# Altium PCB SLT_4U_PEE_V100.PcbDoc (part 5 of 7)
Units mm, origin at the board's own origin, x right, y up, seen from the top; angles counter-clockwise.
Board outline 180 x 80 mm, 6 copper layers (L1 TOP, L2 GND 1, L3 SIGNAL, L4 PWR, L5 GND 2, L6 BOT), stack 1.536 mm thick; 1123 components, 840 nets, 3813 pads, 351 vias.
Unrouted connection lines stored in the file: 2064.
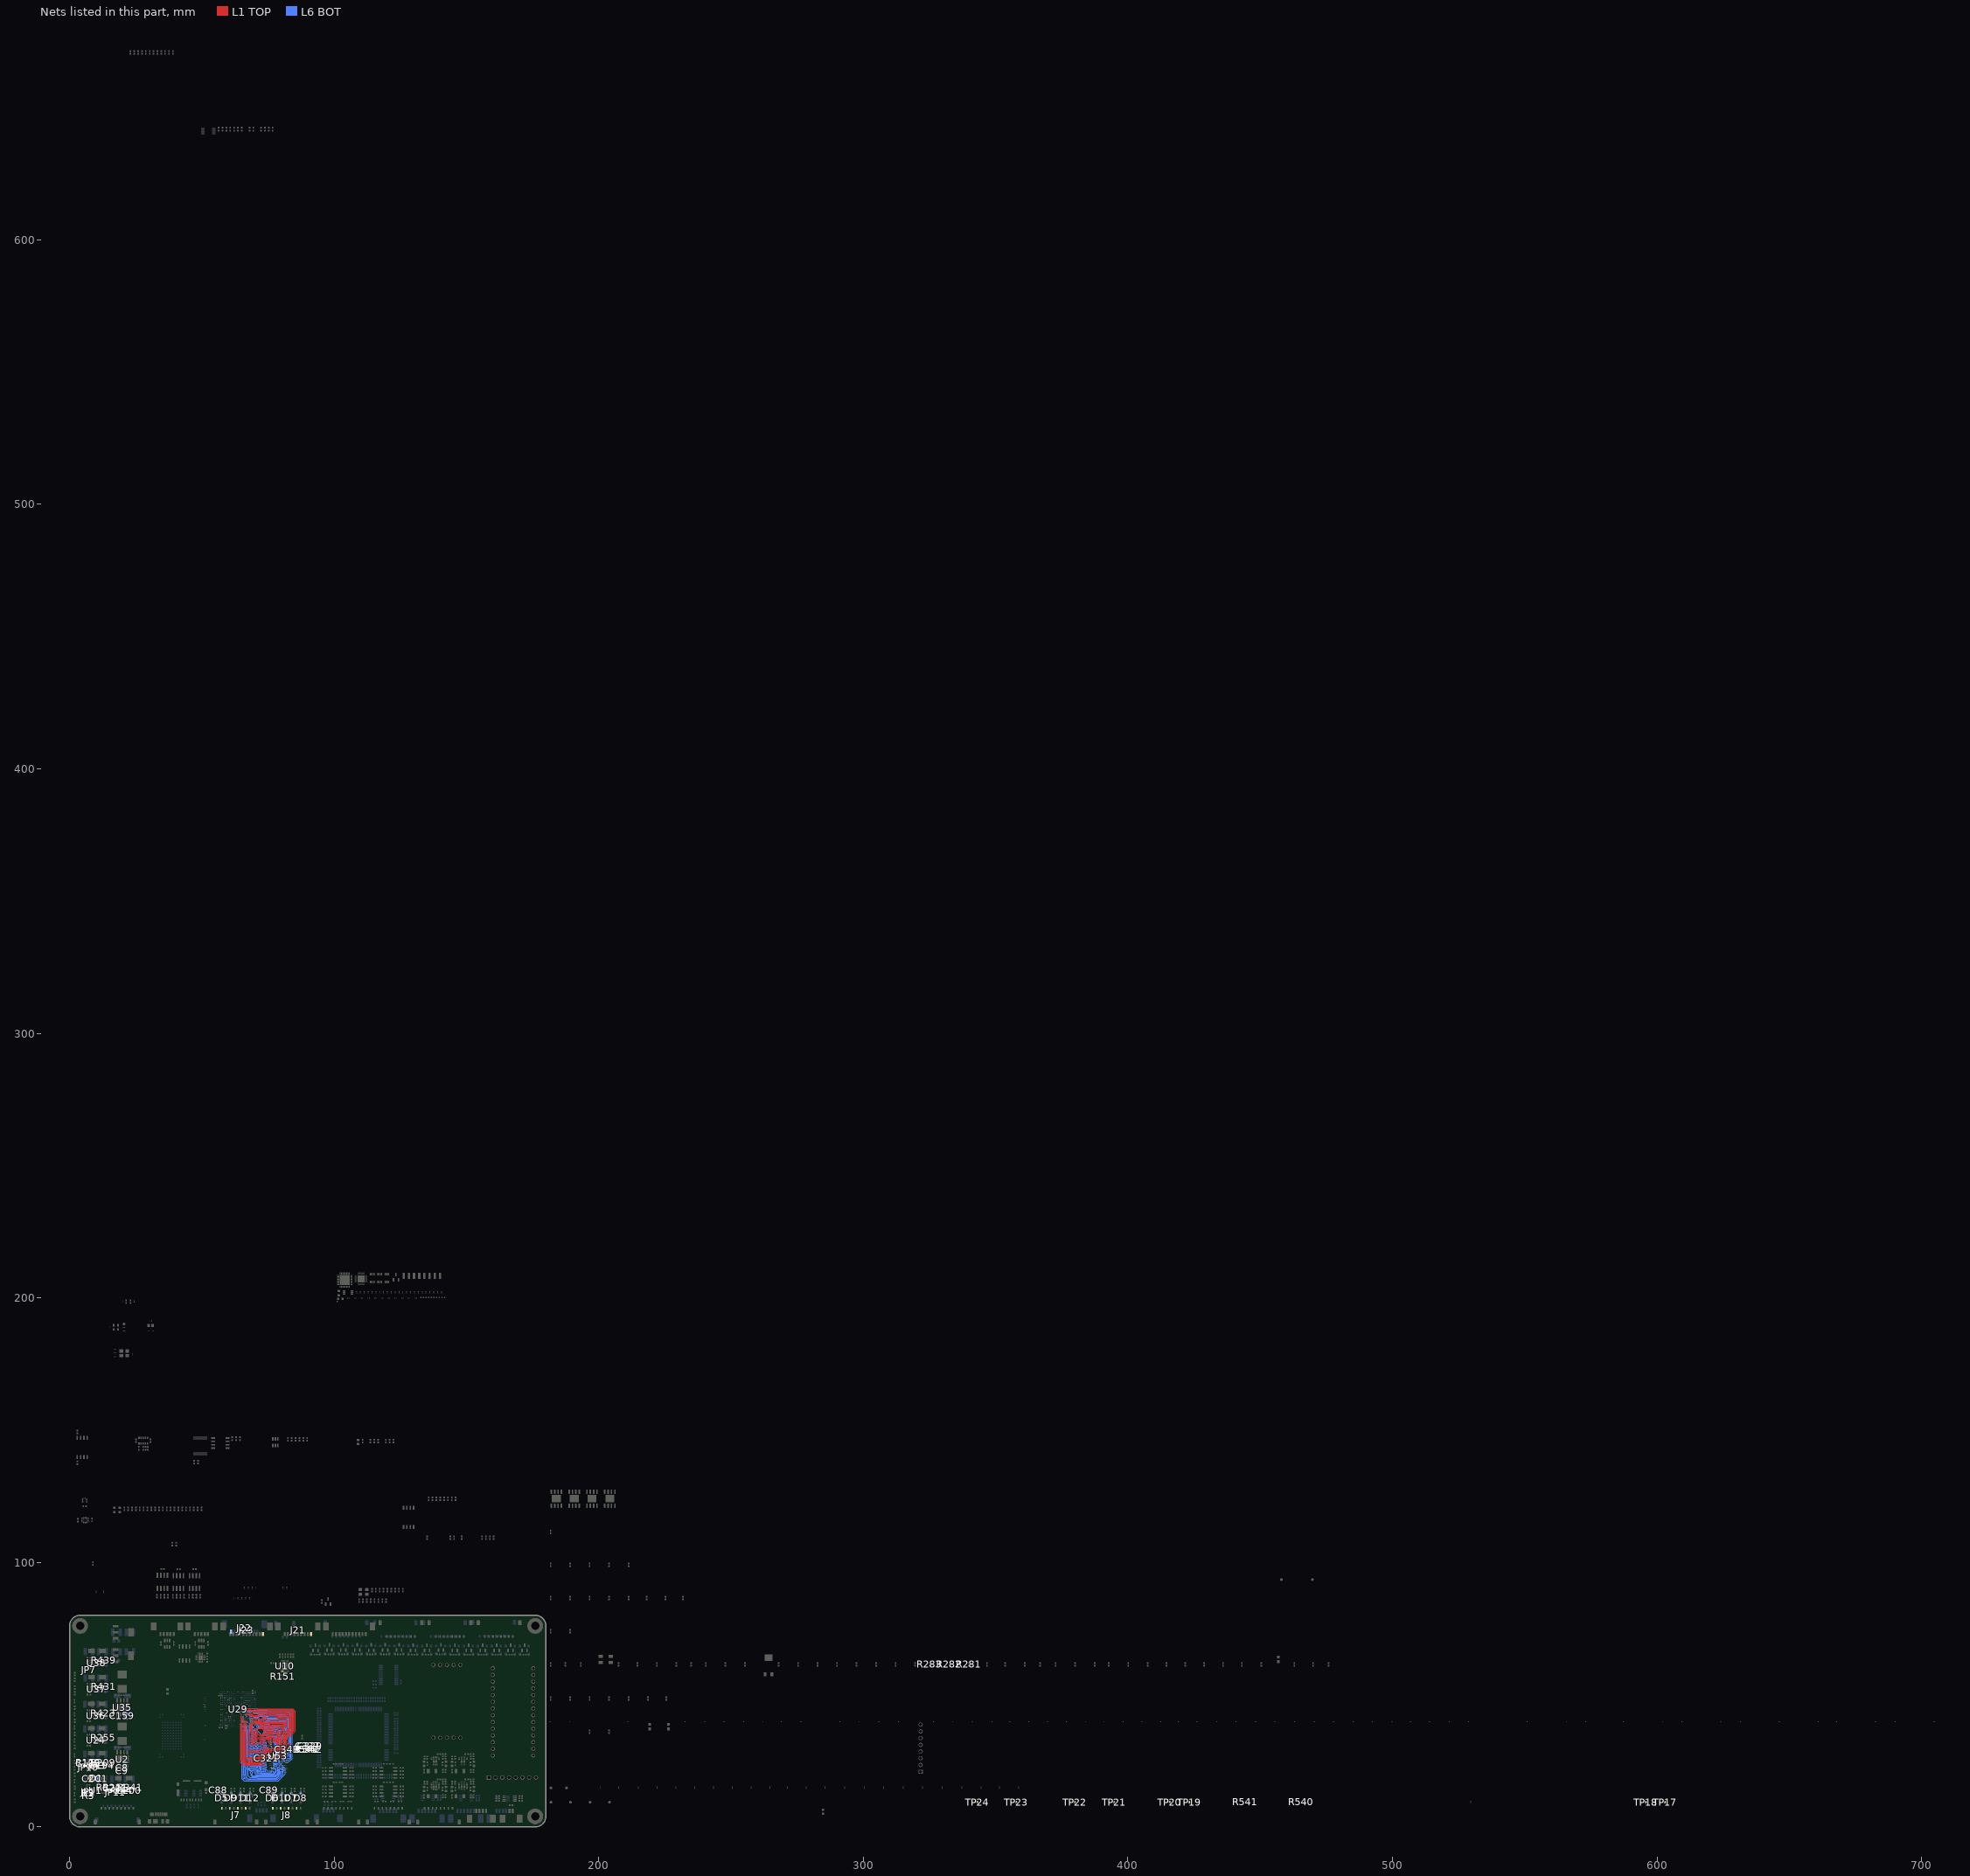
[diagram p5: the nets of this part, all layers, seen from the top]

## Via types
v1: diameter 0.35, hole 0.15, L1 TOP to L6 BOT, 281 vias
v2: diameter 0.4, hole 0.2, L1 TOP to L6 BOT, 61 vias
v3: diameter 0.4, hole 0.2, L1 TOP to L6 BOT, tented both sides, 9 vias

## Nets (pads, with @x,y where several pads share a name; then routed paths per layer and width w, separated by ;. In a path a pad name is that pad's centre, name@x,y a point inside that pad or via, vN(x,y) a via of type N, cw(c..) or ccw(c..) an arc to the next point about the centre after c; other vN are vias at no path point) (continued)
DDR_A3: U29.V6 U53.N2 | length 34
  L1 TOP w0.125: v1(67.237,39.587) 67.918,38.907 67.918,37.951 67.962,37.907 67.962,37.012 67.612,36.662 67.612,35.962 67.412,35.762 67.412,27.262 67.512,27.162 67.812,27.162 67.912,27.262 67.912,28.062 68.012,28.162 71.512,28.162 71.612,28.262 71.612,28.562 71.512,28.662 67.912,28.662 67.812,28.762 67.812,29.062 67.912,29.162 71.612,29.162 71.912,28.862 72.112,28.862 72.512,29.262 73.312,30.062 73.312,30.662 73.412,30.762 73.812,30.762 73.912,30.662 73.912,30.262 74.112,30.062 75.062,30.062 75.237,30.237 75.237,30.712 75.387,30.862 v1(75.862,30.862)
  L6 BOT w0.125: U29.V6@66.912,39.912 v1(67.237,39.587) ; v1(75.862,30.862) U53.N2@76.262,30.462
DDR_A4: U29.R6 U53.P8 | length 34
  L1 TOP w0.125: v1(66.587,42.187) 66.95,42.55 67.636,42.55 67.655,42.568 68.068,42.568 68.099,42.537 68.937,42.537 69.325,42.15 71.1,42.15 71.612,42.662 81.412,42.662 81.512,42.562 81.512,42.262 81.412,42.162 81.112,42.162 81.012,42.062 81.012,41.762 81.112,41.662 83.262,41.662 83.412,41.512 83.412,37.462 81.212,35.262 81.212,32.162 81.075,32.025 81.075,31.5 81.287,31.287 81.987,31.287 82.112,31.162 82.112,30.562 81.987,30.437 81.587,30.437 81.462,30.562 v1(81.462,30.862)
  L6 BOT w0.125: v1(66.587,42.187) U29.R6@66.912,41.862 ; U53.P8@81.062,31.262 v1(81.462,30.862)
DDR_A5: U29.W4 U53.P2 | length 34
  L1 TOP w0.125: v1(68.53,38.937) 68.53,36.462 68.312,36.244 68.312,35.462 68.212,35.362 68.212,31.062 68.312,30.962 68.612,30.962 68.712,31.062 68.712,34.362 68.812,34.462 69.112,34.462 69.212,34.362 69.212,31.062 69.312,30.962 69.612,30.962 69.712,31.062 69.712,34.362 69.812,34.462 70.112,34.462 70.212,34.362 70.212,31.062 70.312,30.962 70.712,30.962 70.812,31.062 70.812,31.562 71.012,31.762 71.812,31.762 72.312,31.262 72.712,31.262 73.112,31.662 73.512,31.662 73.912,32.062 73.912,32.962 74.212,33.262 75.012,33.262 75.237,33.037 75.237,31.987 75.562,31.662 v1(75.862,31.662)
  L6 BOT w0.125: U29.W4@68.212,39.262 68.212,39.012 68.287,38.937 v1(68.53,38.937) ; v1(75.862,31.662) 75.862,31.337 75.937,31.262 U53.P2@76.262,31.262
DDR_A6: U29.P7 U53.R8 | length 34
  L1 TOP w0.125: v1(66.587,42.837) 67.099,42.837 67.137,42.8 67.532,42.8 67.551,42.818 68.418,42.818 68.449,42.787 69.041,42.787 69.237,42.787 69.512,43.062 83.562,43.062 83.712,42.912 83.712,42.712 83.562,42.562 82.037,42.562 81.912,42.437 81.912,42.187 82.037,42.062 83.587,42.062 83.712,41.937 83.712,37.162 81.512,34.962 81.512,31.712 v1(81.462,31.662)
  L6 BOT w0.125: U29.P7@66.262,42.512 v1(66.587,42.837) ; U53.R8@81.062,32.062 81.062,31.762 81.162,31.662 v1(81.462,31.662)
DDR_A7: U29.W2 U53.R2 | length 34
  L1 TOP w0.125: v1(69.812,38.962) 69.487,38.962 69.037,38.512 69.037,35.437 69.212,35.262 71.112,35.262 71.212,35.362 71.212,35.662 71.112,35.762 69.512,35.762 69.412,35.862 69.412,36.162 69.512,36.262 71.062,36.262 71.162,36.362 71.162,36.662 71.062,36.762 70.362,36.762 70.237,36.887 70.237,37.162 70.337,37.262 72.837,37.262 73.137,36.962 74.775,36.962 75.275,36.462 76.512,36.462 76.612,36.362 76.612,36.062 76.512,35.962 74.762,35.962 74.512,36.212 74.512,36.462 74.412,36.562 73.512,36.562 73.412,36.462 73.412,36.162 73.512,36.062 74.112,36.062 74.212,35.962 74.212,35.662 74.112,35.562 73.312,35.562 73.212,35.462 73.212,35.162 73.312,35.062 74.112,35.062 74.212,34.962 74.212,34.662 74.112,34.562 73.312,34.562 73.212,34.462 73.212,34.062 73.312,33.962 75.737,33.962 75.862,33.837 v1(75.862,32.462)
  L6 BOT w0.1: U29.W2@69.512,39.262 v1(69.812,38.962)
  L6 BOT w0.125: v1(75.862,32.462) 76.187,32.462 76.262,32.387 U53.R2@76.262,32.062
DDR_A8: U29.L8 U53.T8 | length 34
  L1 TOP w0.1: v1(65.287,44.787) 65.312,44.812 70.837,44.812 70.987,44.662 71.437,44.662
  L1 TOP w0.125: 71.437,44.662 84.312,44.662 85.312,43.662 85.312,36.287 v1(82.462,33.437)
  L6 BOT w0.125: v1(65.287,44.787) U29.L8@65.612,44.462 ; U53.T8@81.062,32.862 81.562,33.362 82.387,33.362 v1(82.462,33.437)
DDR_A9: U29.V4 U53.R3 | length 34
  L1 TOP w0.125: v1(68.537,39.587) 68.812,39.312 68.962,39.312 69.112,39.162 69.112,38.98 68.787,38.655 68.787,34.987 68.912,34.862 70.312,34.862 70.512,34.662 70.512,32.362 70.662,32.212 70.862,32.212 71.012,32.362 71.012,34.662 71.212,34.862 71.812,34.862 71.912,34.762 71.912,33.862 71.812,33.762 71.512,33.762 71.412,33.662 71.412,33.362 71.512,33.262 71.812,33.262 71.912,33.162 71.912,32.262 72.037,32.137 72.287,32.137 72.412,32.262 72.412,33.162 72.212,33.362 72.212,33.662 72.412,33.862 72.412,34.862 72.512,34.962 72.812,34.962 72.912,34.862 72.912,32.262 73.037,32.137 73.287,32.137 73.412,32.262 73.412,33.462 73.55,33.6 75.375,33.6 75.487,33.487 75.487,32.212 75.637,32.062 76.912,32.062 78.012,32.062 78.112,32.162 78.112,32.462 78.012,32.562 76.762,32.562 v1(76.662,32.462)
  L6 BOT w0.125: U29.V4@68.212,39.912 v1(68.537,39.587) ; v1(76.662,32.462) 76.987,32.462 77.062,32.387 U53.R3@77.062,32.062
DDR_A10: U29.T3 U53.L7 | length 34
  L1 TOP w0.125: v1(69.187,40.887) 69.225,40.925 69.575,40.925 69.612,40.962 71.162,40.962 72.062,40.062 72.712,40.062 72.937,40.287 73.187,40.287 73.412,40.062 81.787,40.062 81.937,39.912 81.937,38.287 81.712,38.062 79.612,38.062 79.512,37.962 79.512,37.662 79.612,37.562 80.812,37.562 80.912,37.462 80.912,37.162 80.812,37.062 80.412,37.062 80.312,36.962 80.312,36.562 79.912,36.162 79.612,36.162 79.512,36.062 79.512,35.762 79.612,35.662 79.762,35.662 79.862,35.562 79.862,35.262 79.762,35.162 79.512,35.162 79.412,35.062 79.412,34.762 79.512,34.662 79.762,34.662 79.862,34.562 79.862,34.262 79.762,34.162 79.612,34.162 79.537,34.162 79.412,34.037 79.412,33.787 79.537,33.662 79.762,33.662 79.862,33.562 79.862,33.262 79.762,33.162 79.512,33.162 79.412,33.062 79.412,32.762 79.512,32.662 79.762,32.662 79.862,32.562 79.862,32.262 79.762,32.162 79.612,32.162 79.512,32.062 79.512,31.762 79.612,31.662 79.762,31.662 79.862,31.562 79.862,31.262 79.762,31.162 79.512,31.162 79.412,31.062 79.412,30.762 79.512,30.662 79.762,30.662 79.862,30.562 79.862,30.262 79.762,30.162 79.612,30.162 79.512,30.062 79.512,29.762 79.612,29.662 80.012,29.662 80.412,29.262 v1(80.662,29.262)
  L6 BOT w0.125: U29.T3@68.862,41.212 v1(69.187,40.887) ; U53.L7@80.262,28.862 v1(80.662,29.262)
DDR_A11: U29.M9 U53.R7 | length 34.1
  L1 TOP w0.125: v1(65.287,43.487) 65.562,43.762 71.412,43.762 71.512,43.862 83.912,43.862 84.512,43.262 84.512,36.762 82.087,34.337 82.087,32.587 v1(82.212,32.462)
  L6 BOT w0.125: U29.M9@64.962,43.812 v1(65.287,43.487) ; U53.R7@80.262,32.062 80.662,32.462 v1(82.212,32.462)
DDR_A12: U29.P5 U53.N7 | length 34.1
  L1 TOP w0.125: v1(67.864,42.206) 67.883,42.187 68.887,42.187 69.212,41.862 71.312,41.862 71.712,42.262 80.512,42.262 80.612,42.162 80.612,41.862 80.512,41.762 78.412,41.762 78.312,41.662 78.312,41.362 78.412,41.262 82.812,41.262 83.012,41.062 83.012,37.637 80.812,35.437 80.812,31.262 81.037,31.037 81.037,30.437 v1(80.662,30.062)
  L6 BOT w0.125: U29.P5@67.562,42.512 U29.P5@67.562,42.512 v1(67.864,42.206) v1(67.864,42.206) ; U53.N7@80.262,30.462 v1(80.662,30.062)
DDR_A13: U29.V2 U53.T3 | length 34
  L1 TOP w0.125: v1(69.812,39.612) 71.162,39.612 72.012,38.762 75.512,38.762 75.612,38.662 75.612,38.362 75.512,38.262 73.487,38.262 73.387,38.362 72.312,38.362 72.212,38.262 72.212,38.062 72.312,37.962 73.212,37.962 73.412,37.762 75.612,37.762 75.712,37.662 75.712,37.362 75.812,37.262 77.212,37.262 77.412,37.062 77.412,35.862 77.512,35.762 78.312,35.762 78.412,35.662 78.412,35.262 78.312,35.162 75.012,35.162 74.912,35.062 74.912,34.762 75.012,34.662 78.312,34.662 78.412,34.562 78.412,34.262 78.312,34.162 76.612,34.162 76.512,34.062 76.512,33.762 76.612,33.662 78.312,33.662 78.412,33.562 78.412,33.262 78.312,33.162 76.762,33.162 v1(76.662,33.262)
  L6 BOT w0.1: U29.V2@69.512,39.912 v1(69.812,39.612)
  L6 BOT w0.125: v1(76.662,33.262) 76.987,33.262 77.062,33.187 U53.T3@77.062,32.862
DDR_A14: U29.L9 U53.T7 | length 34
  L1 TOP w0.125: v1(65.287,44.137) 65.687,44.137 65.812,44.262 66.312,44.262 66.512,44.062 67.412,44.062 67.712,44.362 68.412,44.362 68.712,44.062 70.912,44.062 71.112,44.262 84.112,44.262 84.912,43.462 84.912,36.487 v1(82.462,34.037)
  L6 BOT w0.125: U29.L9@64.962,44.462 v1(65.287,44.137) ; U53.T7@80.262,32.862 81.162,33.762 82.187,33.762 v1(82.462,34.037)
DDR_A15: U29.R4 U53.M7 | length 34
  L1 TOP w0.125: v1(68.537,41.537) 68.812,41.262 71.312,41.262 72.112,40.462 72.612,40.462 73.012,40.862 73.012,41.262 73.212,41.462 74.412,41.462 74.509,41.365 74.509,41.059 74.412,40.962 73.512,40.962 73.412,40.862 73.412,40.562 73.512,40.462 82.062,40.462 82.262,40.262 82.262,38.012 80.212,35.962 80.212,29.962 80.512,29.662 80.912,29.662 81.062,29.512 81.062,28.987 80.937,28.862 79.512,28.862 79.412,28.962 79.412,29.162 79.512,29.262 v1(79.862,29.262)
  L6 BOT w0.125: U29.R4@68.212,41.862 v1(68.537,41.537) ; v1(79.862,29.262) U53.M7@80.262,29.662
DDR_BA0: U29.V8 U53.M2 | length 34
  L1 TOP w0.125: v1(65.937,39.587) 66.012,39.512 66.012,36.862 65.812,36.662 65.812,25.08 66.33,24.562 71.894,24.562 71.994,24.662 71.994,24.98 71.912,25.062 70.012,25.062 69.912,25.162 69.912,25.462 70.012,25.562 72.612,25.562 72.812,25.762 72.812,27.162 74.512,28.862 76.037,28.862 76.437,29.262 v1(76.662,29.262)
  L6 BOT w0.125: U29.V8@65.612,39.912 v1(65.937,39.587) ; U53.M2@76.262,29.662 v1(76.662,29.262)
DDR_BA1: U29.P4 U53.N8 | length 34
  L1 TOP w0.125: v1(69.062,43.162) 69.362,43.462 83.712,43.462 84.112,43.062 84.112,36.962 81.812,34.662 81.812,31.987 82.137,31.662 83.112,31.662 83.337,31.437 83.337,30.287 83.112,30.062 v1(81.462,30.062)
  L6 BOT w0.125: U29.P4@68.212,42.512 68.762,42.837 68.987,42.837 69.062,42.912 v1(69.062,43.162) ; U53.N8@81.062,30.462 v1(81.462,30.062)
DDR_BA2: U29.R8 U53.M3 | length 34.1
  L1 TOP w0.1: 66.037,39.912 66.762,39.912 66.912,39.762 66.912,39.496
  L1 TOP w0.125: v1(65.287,41.537) 65.712,41.112 65.712,40.237 66.037,39.912 ; 66.912,39.496 66.912,39.137 66.812,39.037 66.812,36.462 66.612,36.262 66.612,26.562 66.812,26.362 71.912,26.362 72.062,26.512 72.062,26.712 71.912,26.862 71.512,26.862 71.412,26.962 71.412,27.262 71.512,27.362 71.812,27.362 73.912,29.462 75.287,29.462 75.487,29.662 76.812,29.662 77.312,29.162 77.912,29.162 78.087,29.337 78.087,29.862 77.912,30.037 v1(76.637,30.037)
  L6 BOT w0.125: v1(65.287,41.537) U29.R8@65.612,41.862 ; v1(76.637,30.037) U53.M3@77.037,29.637
DDR_CAS: U29.T8 U53.K3 | length 34.1
  L1 TOP w0.125: v1(65.337,40.888) 65.337,38.766 65.202,38.631 65.202,36.872 65.412,36.662 65.412,24.962 66.212,24.162 72.012,24.162 73.212,25.362 73.212,26.962 74.712,28.462 76.112,28.462 76.512,28.862 77.912,28.862 78.112,28.662 78.112,28.462 77.912,28.262 77.662,28.262 v1(77.462,28.462)
  L6 BOT w0.125: v1(65.337,40.888) 65.337,40.913 65.612,41.188 U29.T8@65.612,41.212 ; U53.K3@77.062,28.062 v1(77.462,28.462)
DDR_CK_N: TP20.0 U29.T4 U53.K7 | length 34
  L1 TOP w0.1: v1(68.537,40.887) 68.773,40.651 68.928,40.651 69.042,40.537 69.156,40.537 69.431,40.262 69.467,40.262 69.517,40.212 69.807,40.212 69.832,40.237 70.842,40.237 70.867,40.212 71.412,40.212 72.062,39.562 81.136,39.562 81.462,39.236 81.462,38.788 81.136,38.462 76.386,38.462 76.286,38.362 76.286,38.062 76.386,37.962 78.786,37.962 79.062,37.686 79.062,36.412 79.062,28.312 79.162,28.212 79.612,28.212 v1(79.862,28.462)
  L6 BOT w0.1: U29.T4@68.212,41.212 v1(68.537,40.887) ; v1(79.862,28.462) U53.K7@80.262,28.062
DDR_CK_P: TP19.0 U29.U4 U53.J7 | length 34
  L1 TOP w0.1: v1(68.537,40.237) 68.605,40.237 68.719,40.351 68.804,40.351 68.918,40.237 69.032,40.237 69.307,39.962 69.957,39.962 69.982,39.937 71.263,39.937 71.938,39.262 81.012,39.262 81.162,39.112 81.162,38.912 81.012,38.762 76.262,38.762 75.986,38.486 75.986,37.938 76.262,37.662 78.662,37.662 78.762,37.562 78.762,37.437 78.762,28.188 79.038,27.912 79.612,27.912 v1(79.862,27.662)
  L6 BOT w0.1: U29.U4@68.212,40.562 v1(68.537,40.237) v1@68.562,40.237 ; v1(79.862,27.662) U53.J7@80.262,27.262
DDR_CKE: U29.V3 U53.K9 | length 34.1
  L1 TOP w0.1: v1(69.162,39.612) 69.487,39.287 69.903,39.287
  L1 TOP w0.125: 69.903,39.287 71.062,39.287 71.812,38.537 71.812,37.762 71.962,37.612 73.037,37.612 73.287,37.362 75.112,37.362 75.612,36.862 76.812,36.862 77.012,36.662 77.012,35.762 76.812,35.562 74.712,35.562 74.512,35.362 74.512,34.462 74.712,34.262 76.012,34.262 76.212,34.062 76.212,33.037 76.387,32.862 78.212,32.862 78.437,32.637 78.437,27.962 78.312,27.837 78.012,27.837 77.912,27.737 77.912,26.662 78.012,26.562 78.312,26.562 78.412,26.662 78.412,27.262 78.512,27.362 78.837,27.362 78.937,27.262 78.937,26.787 79.062,26.662 79.312,26.662 79.787,27.137 80.787,27.137 81.037,27.387 81.037,28.512 81.137,28.612 81.387,28.612 81.512,28.487 81.512,27.712 v1(81.462,27.662)
  L6 BOT w0.1: U29.V3@68.862,39.912 v1(69.162,39.612)
  L6 BOT w0.125: v1(81.462,27.662) 81.462,27.962 81.562,28.062 U53.K9@81.862,28.062
DDR_CS: U29.V7 U53.L2 | length 34
  L1 TOP w0.125: v1(66.587,39.587) 66.587,39.487 66.412,39.312 66.412,36.662 66.212,36.462 66.212,25.162 66.412,24.962 69.387,24.962 69.512,25.087 69.512,25.362 69.412,25.462 66.712,25.462 66.612,25.562 66.612,25.862 66.712,25.962 72.312,25.962 72.462,26.112 72.462,27.412 74.187,29.137 75.412,29.137 75.537,29.262 v1(75.862,29.262)
  L6 BOT w0.125: U29.V7@66.262,39.912 v1(66.587,39.587) ; v1(75.862,29.262) U53.L2@76.262,28.862
DDR_D0: TP17.0 U29.N2 U53.E3 | length 40.7
  L6 BOT w0.1: U29.N2@69.512,43.162 69.812,42.862
  L6 BOT w0.125: 69.812,42.862 69.825,42.85 70.687,42.85 70.712,42.875 73.4,42.875 74.012,42.262 74.712,42.262 74.812,42.162 74.812,41.362 74.912,41.262 82.112,41.262 82.212,41.162 82.212,40.862 82.112,40.762 79.112,40.762 79.012,40.662 79.012,40.362 79.112,40.262 82.012,40.262 82.112,40.162 82.112,35.562 81.612,35.062 81.112,34.562 80.712,34.562 79.412,33.262 79.412,30.062 79.187,29.837 79.187,27.062 79.412,26.837 79.412,26.087 79.187,25.862 79.187,24.537 78.712,24.062 U53.E3@77.062,24.062
DDR_D1: U29.M7 U53.F7 | length 40.6
  L6 BOT w0.1: U29.M7@66.262,43.812 66.362,43.912 70.912,43.912 70.979,43.979 71.179,43.979
  L6 BOT w0.125: 71.179,43.979 74.795,43.979 74.912,43.862 83.612,43.862 83.712,43.762 83.712,43.462 83.612,43.362 83.012,43.362 82.912,43.262 82.912,42.962 83.012,42.862 83.612,42.862 83.712,42.762 83.712,26.062 82.912,25.262 80.662,25.262 U53.F7@80.262,24.862
DDR_D2: U29.R3 U53.F2 | length 40.6
  L6 BOT w0.1: U29.R3@68.862,41.862 69.162,42.162 71.112,42.162
  L6 BOT w0.125: 71.112,42.162 71.512,42.562 73.112,42.562 73.812,41.862 74.312,41.862 74.412,41.762 74.412,41.262 74.812,40.862 78.612,40.862 78.712,40.762 78.712,40.462 78.612,40.362 75.712,40.362 75.612,40.262 75.612,39.962 75.712,39.862 81.612,39.862 81.712,39.762 81.712,38.362 81.512,38.162 81.512,37.762 81.712,37.562 81.712,36.262 81.512,36.062 81.012,36.062 80.812,35.862 80.812,35.262 79.012,33.462 79.012,30.162 78.937,30.087 78.937,26.737 79.012,26.662 79.012,26.237 78.937,26.162 78.937,24.987 78.412,24.462 76.662,24.462 U53.F2@76.262,24.862
DDR_D3: U29.M8 U53.F8 | length 40.7
  L6 BOT w0.125: U29.M8@65.612,43.812 65.925,44.125 70.824,44.125 70.962,44.262 83.812,44.262 84.112,43.962 84.112,25.862 82.712,24.462 81.462,24.462 U53.F8@81.062,24.862
DDR_D4: U29.T2 U53.H3 | length 40.7
  L6 BOT w0.1: U29.T2@69.512,41.212 69.812,40.912 71.187,40.912
  L6 BOT w0.125: 71.187,40.912 71.387,40.712 71.387,40.337 71.212,40.162 70.912,40.162 70.787,40.037 70.787,39.887 70.912,39.762 71.112,39.762 72.012,38.862 72.012,38.262 72.212,38.062 73.362,38.062 74.112,37.312 74.112,35.362 74.237,35.237 74.512,35.237 74.612,35.337 74.612,36.462 74.712,36.562 77.312,36.562 77.412,36.462 77.412,36.187 77.312,36.087 75.012,36.087 74.937,36.012 74.937,35.687 75.012,35.612 77.462,35.612 77.562,35.512 77.562,35.237 77.462,35.137 75.012,35.137 74.937,35.062 74.937,34.737 75.012,34.662 77.462,34.662 77.562,34.562 77.562,34.312 77.462,34.212 ; 74.912,33.712 74.812,33.812 74.812,34.087 74.912,34.187 77.462,34.187 ; 74.912,33.712 77.462,33.712 ; U53.H3@77.062,26.462 77.737,26.462 77.862,26.587 77.862,28.787 77.562,29.087 77.562,33.612 77.462,33.712
DDR_D5: U29.N8 U53.H8 | length 40.6
  L6 BOT w0.1: U29.N8@65.612,43.162 65.937,43.487 66.387,43.487 66.612,43.712 71.162,43.712
  L6 BOT w0.125: 71.162,43.712 74.462,43.712 74.712,43.462 82.412,43.462 82.512,43.362 82.512,43.062 82.412,42.962 81.012,42.962 80.912,42.862 80.912,42.562 81.012,42.462 83.212,42.462 83.312,42.362 83.312,26.262 83.112,26.062 81.462,26.062 U53.H8@81.062,26.462
DDR_D6: U29.T1 U53.G2 | length 40.7
  L6 BOT w0.125: U29.T1@70.162,41.212 71.487,41.212 71.712,40.987 71.712,40.662 71.912,40.462 72.262,40.462 72.637,40.837 73.262,40.837 73.412,40.687 73.412,40.362 73.012,39.962 72.012,39.962 71.912,39.862 71.912,39.562 72.012,39.462 73.212,39.462 73.612,39.862 74.512,39.862 74.612,39.762 74.612,39.462 74.512,39.362 73.812,39.362 73.412,38.962 72.512,38.962 72.412,38.862 72.412,38.562 72.512,38.462 73.512,38.462 73.912,38.862 75.412,38.862 75.512,38.762 75.512,38.462 75.412,38.362 74.112,38.362 74.012,38.262 74.012,37.962 74.112,37.862 75.412,37.862 75.512,37.762 75.512,37.462 75.412,37.362 74.512,37.362 74.412,37.262 74.412,37.062 74.512,36.962 78.912,36.962 79.012,36.862 79.012,36.562 78.912,36.462 77.812,36.462 77.712,36.362 77.712,36.062 77.812,35.962 78.012,35.962 78.112,35.862 78.112,35.637 77.937,35.462 77.937,35.262 78.037,35.162 78.212,35.162 78.312,35.062 78.312,34.762 78.212,34.662 78.037,34.662 77.937,34.562 77.937,29.287 78.137,29.087 78.137,26.187 78.012,26.062 76.662,26.062 U53.G2@76.262,25.662
DDR_D7: U29.N7 U53.H7 | length 40.7
  L6 BOT w0.1: U29.N7@66.262,43.162 66.462,43.162 66.812,43.512 70.612,43.512 70.625,43.5
  L6 BOT w0.125: 70.625,43.5 70.712,43.412 74.162,43.412 74.512,43.062 80.512,43.062 80.612,42.962 80.612,42.662 80.512,42.562 78.812,42.562 78.712,42.462 78.712,42.162 78.812,42.062 82.812,42.062 82.912,41.962 82.912,28.062 82.812,27.962 82.287,27.962 82.187,27.862 82.187,27.562 82.287,27.462 82.812,27.462 82.912,27.362 82.912,26.962 82.812,26.862 80.662,26.862 U53.H7@80.262,26.462
DDR_D8: TP18.0 U29.Y7 U53.D7 | length 40.6
  L6 BOT w0.125: U29.Y7@66.262,38.612 66.575,38.3 66.575,36.262 66.412,36.1 66.412,22.662 66.512,22.562 66.812,22.562 66.912,22.662 66.912,23.962 67.012,24.062 67.312,24.062 67.412,23.962 67.412,23.162 67.512,23.062 67.512,22.562 67.412,22.462 67.412,19.462 67.812,19.062 68.212,18.662 71.012,18.662 71.212,18.462 78.112,18.462 79.787,20.137 79.787,21.037 80.012,21.262 80.462,21.262 80.662,21.462 80.662,22.862 U53.D7@80.262,23.262
DDR_D9: U29.AA4 U53.C3 | length 40.6
  L6 BOT w0.125: U29.AA4@68.212,37.962 68.212,30.762 68.312,30.662 68.912,30.662 69.012,30.562 69.012,30.262 68.912,30.162 68.212,30.162 68.112,30.062 68.112,29.762 68.212,29.662 68.912,29.662 69.012,29.562 69.012,29.262 68.912,29.162 68.212,29.162 68.112,29.062 68.112,28.762 68.212,28.662 68.912,28.662 69.012,28.562 69.012,28.262 68.912,28.162 68.212,28.162 68.112,28.062 68.112,27.762 68.212,27.662 68.912,27.662 69.012,27.562 69.012,27.262 68.912,27.162 68.212,27.162 68.112,27.062 68.112,26.762 68.212,26.662 68.912,26.662 69.012,26.562 69.012,24.562 69.212,24.362 71.912,24.362 72.112,24.162 72.112,21.662 71.812,21.362 70.712,21.362 70.612,21.262 70.612,20.262 70.712,20.162 71.812,20.162 72.112,19.862 77.312,19.862 78.281,20.831 78.281,22.862 78.037,23.106 77.706,23.106 U53.C3@77.062,22.462
DDR_D10: U29.Y9 U53.C8 | length 40.7
  L6 BOT w0.125: U29.Y9@64.962,38.612 64.962,38.57 65.275,38.258 65.275,37.312 65.25,37.287 65.25,18.225 66.012,17.462 78.812,17.462 81.462,20.112 81.462,22.062 U53.C8@81.062,22.462
DDR_D11: U29.Y3 U53.C2 | length 40.7
  L6 BOT w0.125: U29.Y3@68.862,38.612 68.537,38.287 68.537,36.237 68.722,36.052 69.407,36.052 69.512,35.947 69.512,35.662 69.412,35.562 68.712,35.562 68.612,35.462 68.612,35.162 68.712,35.062 69.412,35.062 69.512,34.962 69.512,34.662 69.412,34.562 68.712,34.562 68.612,34.462 68.612,34.162 68.712,34.062 69.412,34.062 69.512,33.962 69.512,33.662 69.412,33.562 68.712,33.562 68.612,33.462 68.612,33.162 68.712,33.062 69.412,33.062 69.512,32.962 69.512,32.662 69.412,32.562 68.712,32.562 68.612,32.462 68.612,32.162 68.712,32.062 69.412,32.062 69.512,31.962 69.512,31.662 69.412,31.562 68.712,31.562 68.612,31.462 68.612,31.162 68.712,31.062 69.312,31.062 69.412,30.962 69.412,25.262 69.812,24.862 72.112,24.862 72.512,24.462 72.512,21.362 72.112,20.962 71.012,20.962 70.912,20.862 70.912,20.662 71.012,20.562 72.012,20.562 72.412,20.162 77.012,20.162 77.862,21.012 77.862,21.712 77.505,22.069 76.655,22.069 U53.C2@76.262,22.462
DDR_D12: U29.AA7 U53.A7 | length 40.6
  L6 BOT w0.125: U29.AA7@66.262,37.962 66.262,36.712 66.012,36.462 66.012,19.562 66.112,19.462 66.412,19.462 66.512,19.562 66.512,22.062 66.612,22.162 66.912,22.162 67.012,22.062 67.012,18.562 67.312,18.262 70.812,18.262 70.912,18.162 78.312,18.162 80.262,20.112 U53.A7@80.262,20.862
DDR_D13: U29.AA3 U53.A2 | length 40.7
  L6 BOT w0.125: U29.AA3@68.862,37.962 68.862,36.512 68.987,36.387 70.187,36.387 70.312,36.262 70.312,35.442 70.207,35.337 69.917,35.337 69.812,35.232 69.812,34.917 69.917,34.812 70.207,34.812 70.312,34.707 70.312,34.392 70.207,34.287 70.007,34.287 69.902,34.182 69.902,33.867 70.007,33.762 70.207,33.762 70.312,33.657 70.312,33.342 70.207,33.237 70.007,33.237 69.902,33.132 69.902,32.817 70.007,32.712 70.207,32.712 70.312,32.607 70.312,32.292 70.207,32.187 70.007,32.187 69.902,32.082 69.902,31.767 70.007,31.662 70.707,31.662 70.812,31.557 70.812,31.242 70.707,31.137 70.012,31.137 69.907,31.032 69.907,30.717 70.012,30.612 70.707,30.612 70.812,30.507 70.812,30.192 70.707,30.087 69.917,30.087 69.812,29.982 69.812,29.667 69.917,29.562 70.807,29.562 70.912,29.457 70.912,29.142 70.807,29.037 69.917,29.037 69.812,28.932 69.812,28.617 69.917,28.512 70.807,28.512 70.912,28.407 70.912,28.092 70.807,27.987 69.917,27.987 69.812,27.882 69.812,27.567 69.917,27.462 70.707,27.462 70.812,27.357 70.812,27.042 70.707,26.937 69.917,26.937 69.812,26.832 69.812,26.517 69.917,26.412 70.707,26.412 70.812,26.307 70.812,25.992 70.707,25.887 69.917,25.887 69.812,25.782 69.812,25.467 69.917,25.362 72.212,25.362 72.912,24.662 72.912,21.562 73.012,21.462 74.012,21.462 74.112,21.362 74.112,21.062 74.012,20.962 72.612,20.962 72.512,20.862 72.512,20.562 72.612,20.462 75.862,20.462 U53.A2@76.262,20.862
DDR_D14: U29.W7 U53.B8 | length 40.7
  L6 BOT w0.125: U29.W7@66.262,39.262 65.95,38.95 65.95,38.102 65.95,37.833 65.975,37.808 65.975,36.9 65.612,36.537 65.612,18.362 65.712,18.262 66.012,18.262 66.112,18.362 66.112,18.862 66.212,18.962 66.512,18.962 66.612,18.862 66.612,17.962 66.712,17.862 78.612,17.862 80.662,19.912 80.662,21.087 80.812,21.237 80.937,21.237 81.062,21.362 U53.B8@81.062,21.662
DDR_D15: U29.W3 U53.A3 | length 40.7
  L6 BOT w0.125: U29.W3@68.862,39.262 69.187,38.937 69.187,38.764 69.175,38.752 69.175,38.092 69.187,38.079 69.187,36.837 69.312,36.712 70.112,36.712 70.237,36.837 70.237,37.162 70.362,37.287 70.587,37.287 70.712,37.162 70.712,32.162 70.862,32.012 71.812,32.012 71.937,31.887 71.937,31.612 71.812,31.487 71.312,31.487 71.187,31.362 71.187,30.987 71.312,30.862 71.812,30.862 71.937,30.737 71.937,30.362 71.812,30.237 71.312,30.237 71.187,30.112 71.187,29.737 71.312,29.612 71.812,29.612 71.937,29.487 71.937,29.112 71.812,28.987 71.312,28.987 71.187,28.862 71.187,28.487 71.312,28.362 71.812,28.362 71.937,28.237 71.937,27.862 71.812,27.737 71.312,27.737 71.187,27.612 71.187,27.237 71.312,27.112 71.812,27.112 71.937,26.987 71.937,26.612 71.812,26.487 71.312,26.487 71.187,26.362 71.187,25.987 71.312,25.862 74.312,25.862 74.412,25.762 74.412,25.462 74.312,25.362 73.412,25.362 73.312,25.262 73.312,24.962 73.412,24.862 74.312,24.862 74.412,24.762 74.412,24.462 74.312,24.362 73.412,24.362 73.312,24.262 73.312,23.962 73.412,23.862 74.312,23.862 74.412,23.762 74.412,23.462 74.312,23.362 73.412,23.362 73.312,23.262 73.312,22.962 73.412,22.862 74.312,22.862 74.412,22.762 74.412,22.462 74.312,22.362 73.412,22.362 73.312,22.262 73.312,21.962 73.412,21.862 74.312,21.862 74.412,21.762 74.412,21.462 74.612,21.262 76.662,21.262 U53.A3@77.062,20.862
DDR_DQM0: U29.N1 U53.E7 | length 40.7
  L6 BOT w0.125: U29.N1@70.162,43.162 70.195,43.129 73.845,43.129 74.312,42.662 78.212,42.662 78.312,42.562 78.312,42.262 78.212,42.162 75.212,42.162 75.112,42.062 75.112,41.762 75.212,41.662 82.412,41.662 82.512,41.562 82.512,34.662 81.912,34.062 80.812,34.062 79.812,33.062 79.812,29.962 79.462,29.612 79.462,27.362 79.812,27.012 79.812,25.962 79.462,25.612 79.462,24.862 79.612,24.712 79.612,23.762 79.712,23.662 79.862,23.662 U53.E7@80.262,24.062
DDR_DQM1: U29.Y4 U53.D3 | length 40.6
  L6 BOT w0.1: 67.912,37.037 67.912,38.312 U29.Y4@68.212,38.612
  L6 BOT w0.125: 67.912,37.037 67.712,36.837 67.712,26.362 67.812,26.262 68.412,26.262 68.612,26.062 68.612,24.062 68.812,23.862 71.512,23.862 71.712,23.662 71.712,22.262 71.212,21.762 69.412,21.762 69.312,21.662 69.312,21.362 69.412,21.262 70.112,21.262 70.212,21.162 70.212,19.962 70.412,19.762 71.612,19.762 71.812,19.562 77.612,19.562 78.662,20.612 78.662,22.512 78.812,22.662 79.412,22.662 79.612,22.862 79.612,23.162 79.212,23.562 78.812,23.562 78.712,23.462 78.312,23.462 78.112,23.662 77.462,23.662 U53.D3@77.062,23.262
DDR_DQS0_N: TP22.0 U29.R2 U53.G3 | length 40.7
  L6 BOT w0.1: U29.R2@69.512,41.862 69.512,41.687 69.662,41.537 71.462,41.537 71.812,41.887 72.588,41.887 73.313,41.162 73.788,41.162 73.862,41.088 73.862,40.613 74.312,40.163 74.787,40.163 74.937,40.013 74.937,39.513 75.288,39.162 80.888,39.162 81.012,39.038 81.012,38.686 80.888,38.562 76.088,38.562 75.812,38.286 75.812,37.686 76.112,37.386 80.912,37.386 81.012,37.286 81.012,36.935 80.888,36.811 79.588,36.811 79.312,36.535 79.312,34.962 79.112,34.762 78.812,34.762 78.312,34.262 78.312,29.862 78.387,29.787 78.387,25.637 78.162,25.412 77.137,25.412 77.062,25.487 U53.G3@77.062,25.662
DDR_DQS0_P: TP21.0 U29.R1 U53.F3 | length 40.7
  L6 BOT w0.1: U29.R1@70.162,41.862 70.187,41.837 71.338,41.837 71.688,42.187 72.712,42.187 73.437,41.462 73.912,41.462 74.162,41.212 74.162,40.737 74.436,40.463 74.911,40.463 75.237,40.137 75.237,39.637 75.412,39.462 81.012,39.462 81.312,39.162 81.312,38.562 81.012,38.262 76.212,38.262 76.112,38.162 76.112,37.811 76.236,37.686 81.036,37.686 81.312,37.411 81.312,36.811 81.012,36.511 79.712,36.511 79.612,36.411 79.612,34.838 79.236,34.462 78.936,34.462 78.612,34.138 78.612,29.986 78.687,29.911 78.687,25.513 78.286,25.112 77.312,25.112 U53.F3@77.062,24.862
DDR_DQS1_N: TP24.0 U29.AA6 U53.B7 | length 40.6
  L6 BOT w0.1: U29.AA6@66.912,37.962 66.912,35.662 66.812,35.562 66.812,35.362 66.912,35.262 66.912,34.862 66.812,34.762 66.812,34.562 66.912,34.462 66.912,33.862 66.812,33.762 66.812,33.562 66.912,33.462 66.912,25.838 67.188,25.562 67.788,25.562 67.912,25.438 67.912,24.962 67.812,24.862 67.812,23.362 68.112,23.062 70.924,23.062 71.036,22.95 71.036,22.586 70.912,22.462 68.088,22.462 67.812,22.186 67.812,21.538 68.088,21.262 68.488,21.262 68.612,21.138 68.612,20.912 68.162,20.462 68.612,20.012 68.612,19.362 68.912,19.062 71.287,19.062 71.487,18.862 77.936,18.862 79.387,20.313 79.387,21.737 79.562,21.912 80.012,21.912 U53.B7@80.262,21.662
DDR_DQS1_P: TP23.0 U29.Y6 U53.C7 | length 40.7
  L6 BOT w0.1: U29.Y6@66.912,38.612 66.912,38.412 67.212,38.112 67.212,25.962 67.312,25.862 67.912,25.862 68.212,25.562 68.212,24.838 68.112,24.738 68.112,23.486 68.236,23.362 71.048,23.362 71.336,23.074 71.336,22.462 71.036,22.162 68.212,22.162 68.112,22.062 68.112,21.662 68.212,21.562 68.612,21.562 68.912,21.262 68.912,20.912 69.362,20.462 68.912,20.012 68.912,19.486 69.036,19.362 71.411,19.362 71.611,19.162 77.812,19.162 79.087,20.437 79.087,21.861 79.438,22.212 80.012,22.212 U53.C7@80.262,22.462
DDR_ODT: U29.W1 U53.K1 | length 37
  L6 BOT w0.125: U29.W1@70.162,39.262 70.462,38.962 70.687,38.962 70.887,38.762 70.887,38.362 71.612,37.637 71.612,37.387 71.762,37.237 72.887,37.237 73.437,36.687 73.437,35.587 73.062,35.212 73.062,34.912 73.212,34.762 73.212,34.562 73.012,34.362 73.012,34.062 73.112,33.962 73.312,33.962 73.812,33.962 73.912,33.862 73.912,33.562 73.812,33.462 73.112,33.462 73.012,33.362 73.012,33.062 73.112,32.962 73.812,32.962 73.912,32.862 73.912,32.562 73.812,32.462 73.112,32.462 73.012,32.362 73.012,32.062 73.112,31.962 74.412,31.962 74.512,31.862 74.512,31.562 74.412,31.462 73.112,31.462 73.012,31.362 73.012,31.062 73.112,30.962 74.382,30.962 74.482,30.862 74.482,30.562 74.382,30.462 73.112,30.462 73.012,30.362 73.012,30.062 73.112,29.962 74.912,29.962 75.012,29.862 75.012,29.562 74.912,29.462 73.112,29.462 73.012,29.362 73.012,29.062 73.112,28.962 74.912,28.962 75.012,28.862 75.012,28.562 74.912,28.462 73.112,28.462 73.012,28.362 73.012,28.087 73.137,27.962 74.512,27.962 74.612,27.862 74.612,27.562 74.512,27.462 73.112,27.462 73.012,27.362 73.012,27.087 73.137,26.962 74.912,26.962 75.012,27.062 75.012,27.612 U53.K1@75.462,28.062
DDR_RAS: U29.U8 U53.J3 | length 34
  L1 TOP w0.125: v1(64.637,38.937) 64.637,24.137 65.412,23.362 73.412,23.362 74.012,23.962 74.012,26.562 74.337,26.887 76.987,26.887 77.462,27.362 v1(77.462,27.662)
  L6 BOT w0.125: v1(64.637,38.937) 65.3,39.6 65.3,40.052 65.287,40.064 65.287,40.237 U29.U8@65.612,40.562 ; U53.J3@77.062,27.262 v1(77.462,27.662)
DDR_RESET: R540.2 U29.V1 U53.T2 | length 11.2
  L6 BOT w0.125: U29.V1@70.162,39.912 70.712,39.362 70.962,39.362 71.612,38.712 71.612,38.162 72.112,37.662 73.212,37.662 73.812,37.062 73.812,35.062 73.987,34.887 74.437,34.887 74.525,34.8 74.525,34.562 74.525,33.55 74.712,33.362 75.762,33.362 U53.T2@76.262,32.862
DDR_VREF: C321.1 C329.2 C337.1 C341.1 C342.1 R542.2 R543.1 U29.Y1 U53.H1 U53.M8 | length 27.9
  L1 TOP w0.3: 70.25,38.962 v1(70.537,38.487) ; C321.1@74.462,26.187 v1(74.862,26.462) 75.462,26.462 75.512,26.512 76.512,26.512 76.962,26.062 79.637,26.062 80.187,26.612 81.287,26.612 81.937,27.262 81.937,29.262 v1(81.462,29.262)
  L6 BOT w0.3: U29.Y1@70.162,38.612 v1(70.537,38.487) 70.612,37.887 71.162,37.434
  L6 BOT w0.35: U53.M8@81.062,29.662 v1(81.462,29.262)
  L6 BOT w0.4: 71.162,37.434 71.162,36.262 72.512,34.912 72.512,34.212 72.512,33.637 72.512,33.062 72.512,32.487 72.512,26.662 72.712,26.462 v1(74.862,26.462) U53.H1@75.462,26.462
DDR_WE: U29.N10 U53.L3 | length 34.1
  L1 TOP w0.1: 64.962,41.057 64.962,41.003 64.987,40.978 64.987,40.662
  L1 TOP w0.125: v1(64.637,42.837) 64.937,42.537 64.937,41.822 64.925,41.81 64.925,41.095 64.962,41.057 ; 64.987,40.662 65.012,40.637 65.012,38.795 64.952,38.734 64.952,24.922 66.112,23.762 72.112,23.762 73.612,25.262 73.612,26.637 75.037,28.062 76.262,28.062 v1(76.662,28.462)
  L6 BOT w0.125: U29.N10@64.312,43.162 v1(64.637,42.837) ; v1(76.662,28.462) U53.L3@77.062,28.862
DDR_ZQ: R541.2 U29.AA2 | length 1.8
  L1 TOP w0.125: 69.412,36.637 69.687,36.637 69.837,36.787 v1(69.837,37.137)
  L6 BOT w0.125: U29.AA2@69.512,37.962 69.479,37.929 69.479,37.791 69.475,37.787 69.475,37.487 69.824,37.137 v1(69.837,37.137)
eFUSE_ILIM_5/12V_Solenoid: R151.2 R439.2 U38.9 | length 2
  L1 TOP w0.254: U38.9@11.052,62.192 12.126,62.192 ccw(c12.126,62.446) 12.38,62.432 12.403,62.842 R439.2@12.412,62.992
eFUSE_ILIM_5V_HD4: R431.2 U10.7 U37.9 | length 2
  L1 TOP w0.254: U37.9@11.037,52.262 12.111,52.262 ccw(c12.111,52.516) 12.365,52.501 12.388,52.912 R431.2@12.397,53.062
eFUSE_ILIM_5V_SOM: R255.2 R282.1 R283.1 U24.9 | length 2
  L1 TOP w0.254: U24.9@10.953,32.99 12.027,32.99 ccw(c12.027,33.244) 12.281,33.23 12.305,33.64 R255.2@12.313,33.79
eFUSE_ILIM_5V_TEC: R423.2 U10.6 U36.9 | length 2
  L1 TOP w0.254: U36.9@10.953,42.261 12.027,42.261 ccw(c12.027,42.515) 12.281,42.501 12.305,42.911 R423.2@12.313,43.061
eFUSE_ILIM_12V_HEATER: R341.2 U10.9 U44.9 | length 2
  L1 TOP w0.254: U44.9@21.116,14.067 22.19,14.067 ccw(c22.19,14.321) 22.444,14.307 22.468,14.717 R341.2@22.476,14.867
eFUSE_ILIM_12V_LP: R209.2 U10.8 U43.9 | length 2
  L1 TOP w0.254: U43.9@10.95,23.465 12.024,23.465 ccw(c12.024,23.719) 12.278,23.705 12.302,24.115 R209.2@12.31,24.265
eFUSE_ILIM_IF_12V: R6.2 R281.1 U1.9 | length 2
  L1 TOP w0.254: U1.9@10.826,14.067 11.888,14.067 ccw(c11.888,14.321) 12.068,14.141 12.112,14.186 ccw(c11.932,14.365) 12.186,14.365 R6.2@12.186,14.867
EXP_12V: C1.2 C2.2 C8.2 C9.2 C88.2 C89.2 C159.2 C194.2 C195.2 C200.2 C201.2 D1.1 D5.1 D6.1 D7.1 D8.1 D9.1 D10.1 D11.1 D12.1 J7.1 J7.3 J7.5 J7.7 J8.1 J8.3 J8.5 J8.7 J21.1 J22.1 J23.1 JP1.2 JP7.1 JP10.1 JP11.1 R2.2 R3.2 R129.2 R211.2 U1.6 U2.7 U35.7 U43.5 U44.5
  other v2: 19.434,12.065 19.688,15.875 9.652,17.145 21.336,21.336 9.268,21.463 9.522,25.273

## Text inside footprints (layer, text, board x,y; h text height)
C310: Top Courtyard "C" at 74.389,30.933 h0.2 r270
C311: Top Courtyard "C" at 74.331,21.346 h0.2 r270
C312: Top Courtyard "C" at 81.534,20.751 h0.2 r180
C313: Top Courtyard "C" at 74.373,22.923 h0.2 r270
C314: Top Courtyard "C" at 82.161,21.993 h0.2 r90
C315: Top Courtyard "C" at 75.765,23.742 h0.2 r270
C316: Top Courtyard "C" at 81.961,24.538 h0.2 r270
C317: Top Courtyard "C" at 74.589,24.372 h0.2 r90
C318: Top Courtyard "C" at 75.965,25.173 h0.2 r90
C319: Top Courtyard "C" at 82.169,25.988 h0.2 r90
C321: Top Courtyard "C" at 74.358,26 h0.2 r270
C322: Top Courtyard "C" at 67.845,43.055 h0.2
C323: Top Courtyard "C" at 67.21,40.969 h0.2 r270
C324: Top Courtyard "C" at 67.994,40.819 h0.2 r90
C325: Top Courtyard "C" at 65.508,37.914 h0.2 r270
C326: Top Courtyard "C" at 66.501,41.41 h0.2
C327: Top Courtyard "C" at 70.113,42.412 h0.2
C328: Top Courtyard "C" at 69.326,38.043 h0.2 r270
C329: Top Courtyard "C" at 91.076,30.593 h0.2 r90
C330: Top Courtyard "C" at 67.662,37.832 h0.2 r90
C331: Top Courtyard "C" at 63.448,44.096 h0.2 r90
C332: Top Courtyard "C" at 64.464,44.4 h0.2 r90
C334: Top Courtyard "C" at 70.251,40.462 h0.2
C335: Top Courtyard "C" at 62.6,42.09 h0.2
C336: Top Courtyard "C" at 66.088,40.637 h0.2 r270
C337: Top Courtyard "C" at 90.276,30.593 h0.2 r90
C338: Top Courtyard "C" at 64.537,40.312 h0.2 r270
C339: Top Courtyard "C" at 65.838,42.979 h0.2 r270
C341: Top Courtyard "C" at 82.118,29.149 h0.2
C342: Top Courtyard "C" at 91.076,29.293 h0.2 r90
U23: Bottom Overlay "10" at 33.464,43.68 h1.27 r270; Bottom Overlay "1" at 42.564,43.88 h1.27 r270; Bottom Overlay "U" at 46.664,25.68 h1.27; Bottom Overlay "A" at 46.764,41.98 h1.27; Bottom Assembly "10" at 33.529,44.17 h1.27 r270; Bottom Assembly "1" at 42.529,44.17 h1.27 r270; Bottom Assembly "U" at 46.982,25.845 h1.27; Bottom Assembly "A" at 46.982,41.845 h1.27
U29: Bottom Assembly "A1" at 70.462,50.287 h1
U30: Top Component Outline "*" at 3.442,140.843 h1.27 r90
U42: Top Component Outline "*" at 126.741,114.433 h1.27 r90
U51: Top Assembly "1" at 101.729,208.659 h0.76 r270
U53: Top Overlay "A" at 72.972,21.497 h1.27 r180; Top Overlay "T" at 72.972,33.497 h1.27 r180; Top Overlay "1" at 74.827,19.179 h1.27 r270; Top Overlay "9" at 81.227,19.179 h1.27 r270; Bottom Overlay "A" at 72.337,21.497 h1.27 r180; Bottom Overlay "T" at 72.337,33.497 h1.27 r180; Bottom Overlay "1" at 76.097,19.179 h1.27 r90; Bottom Overlay "9" at 82.497,19.179 h1.27 r90; Bottom Overlay "RefDes" at 76.757,27.497 h1.27 r180; Bottom Overlay "REFDES" at 76.44,27.497 h1.27 r180; Mechanical 13 "A" at 72.337,21.497 h1.27 r180; Mechanical 13 "T" at 72.337,33.497 h1.27 r180; Mechanical 13 "1" at 76.097,19.179 h1.27 r90; Mechanical 13 "9" at 82.497,19.179 h1.27 r90; Mechanical 13 "RefDes2" at 76.44,27.497 h1.27 r180
Y2: Top Assembly "1" at 16.628,187.954 h0.4
Y4: Top Assembly "1" at 21.398,197.925 h0.4